# Altium PCB LM2596.PcbDoc
Units mm, origin at the board's own origin, x right, y up, seen from the top; angles counter-clockwise.
Board outline 46.5 x 27.5 mm, 2 copper layers (Top Layer, Bottom Layer), stack 1.571 mm thick; 7 components, 5 nets, 22 pads, 35 vias.
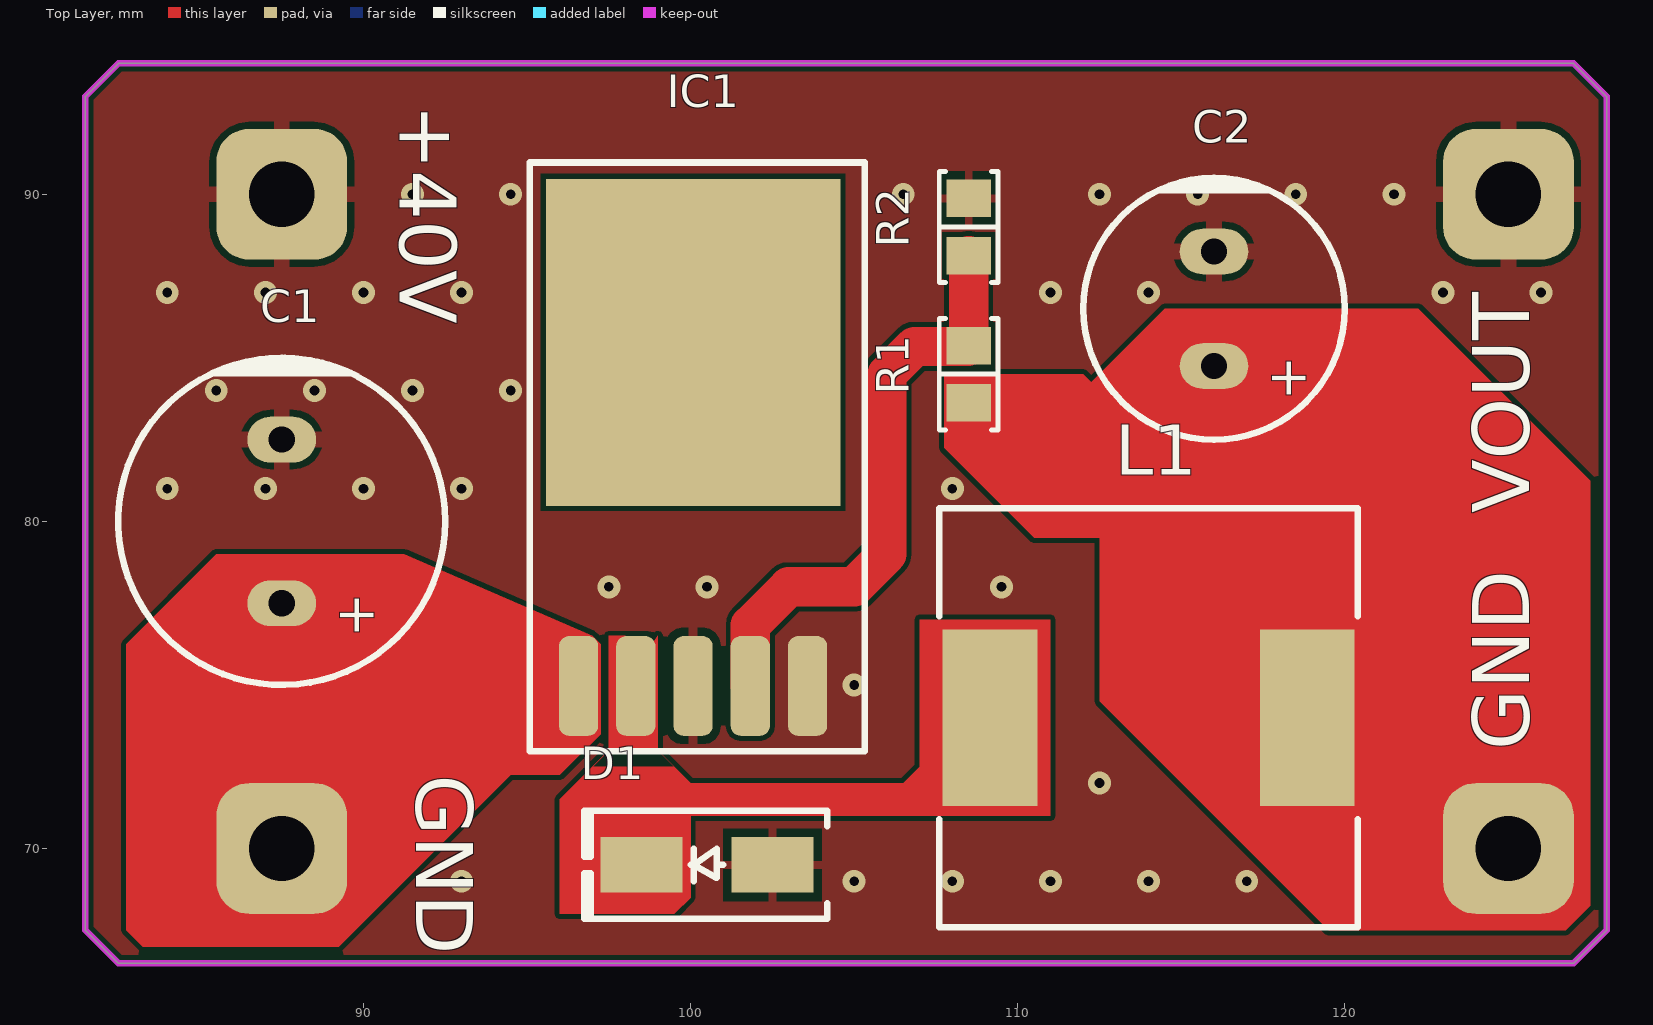
[diagram p0: Top Layer view]
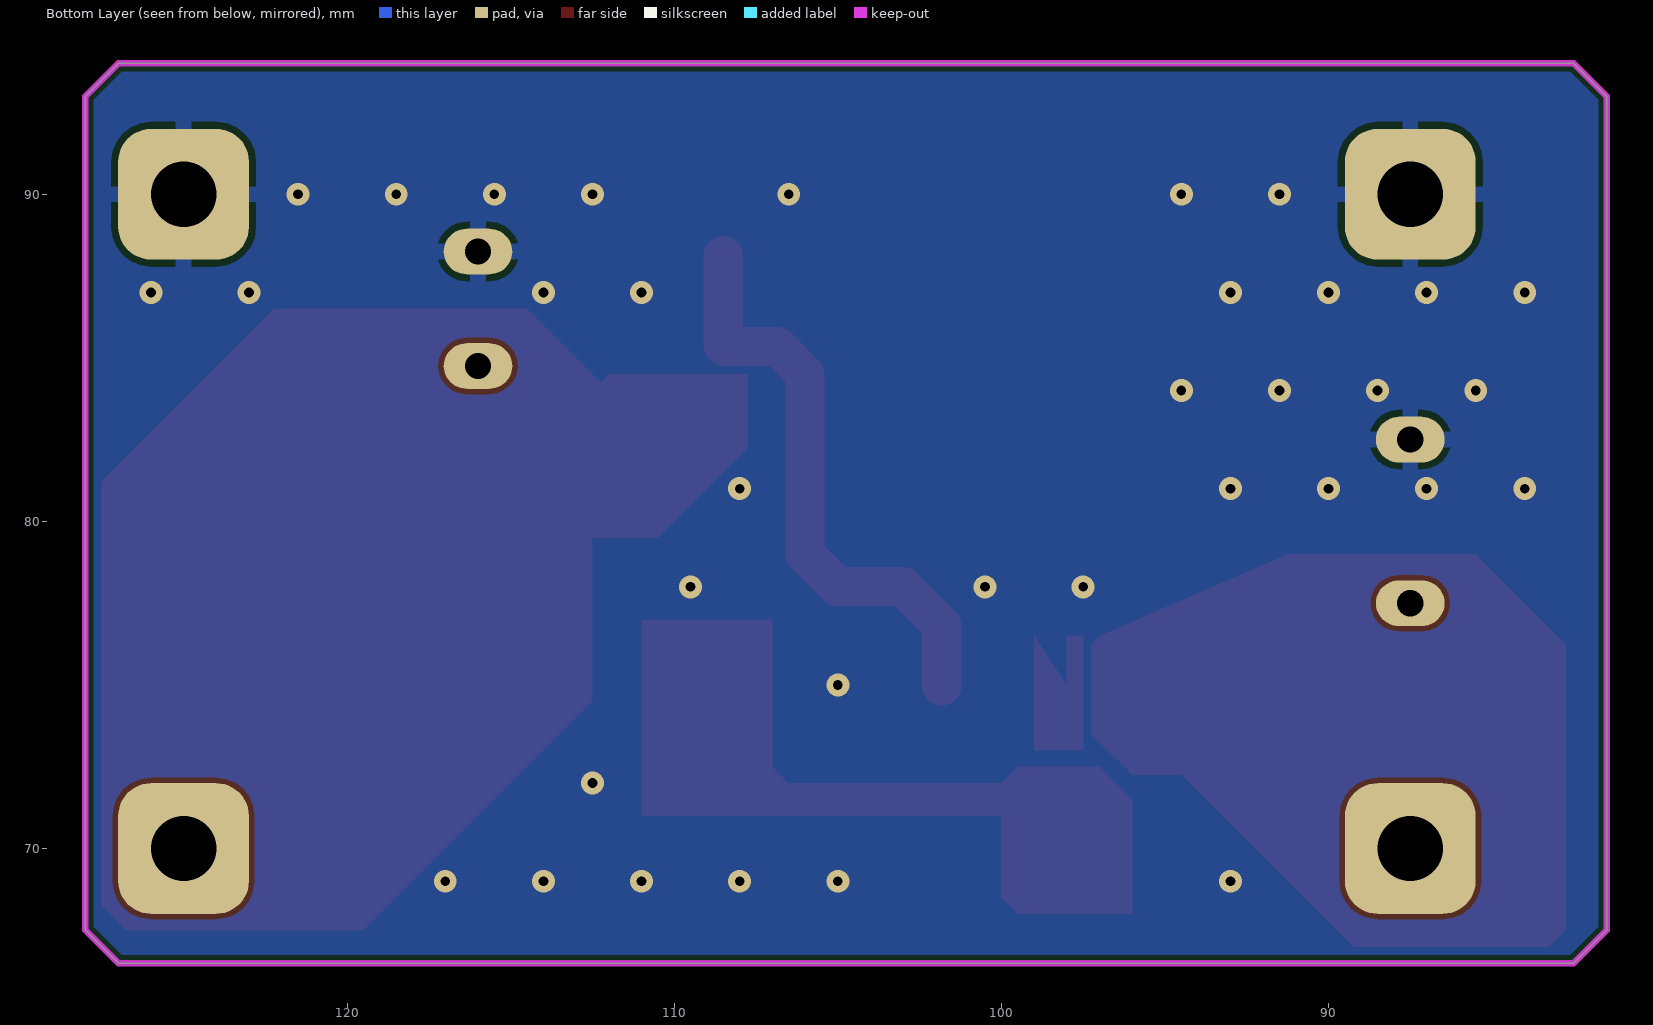
[diagram p1: Bottom Layer view, seen from below]
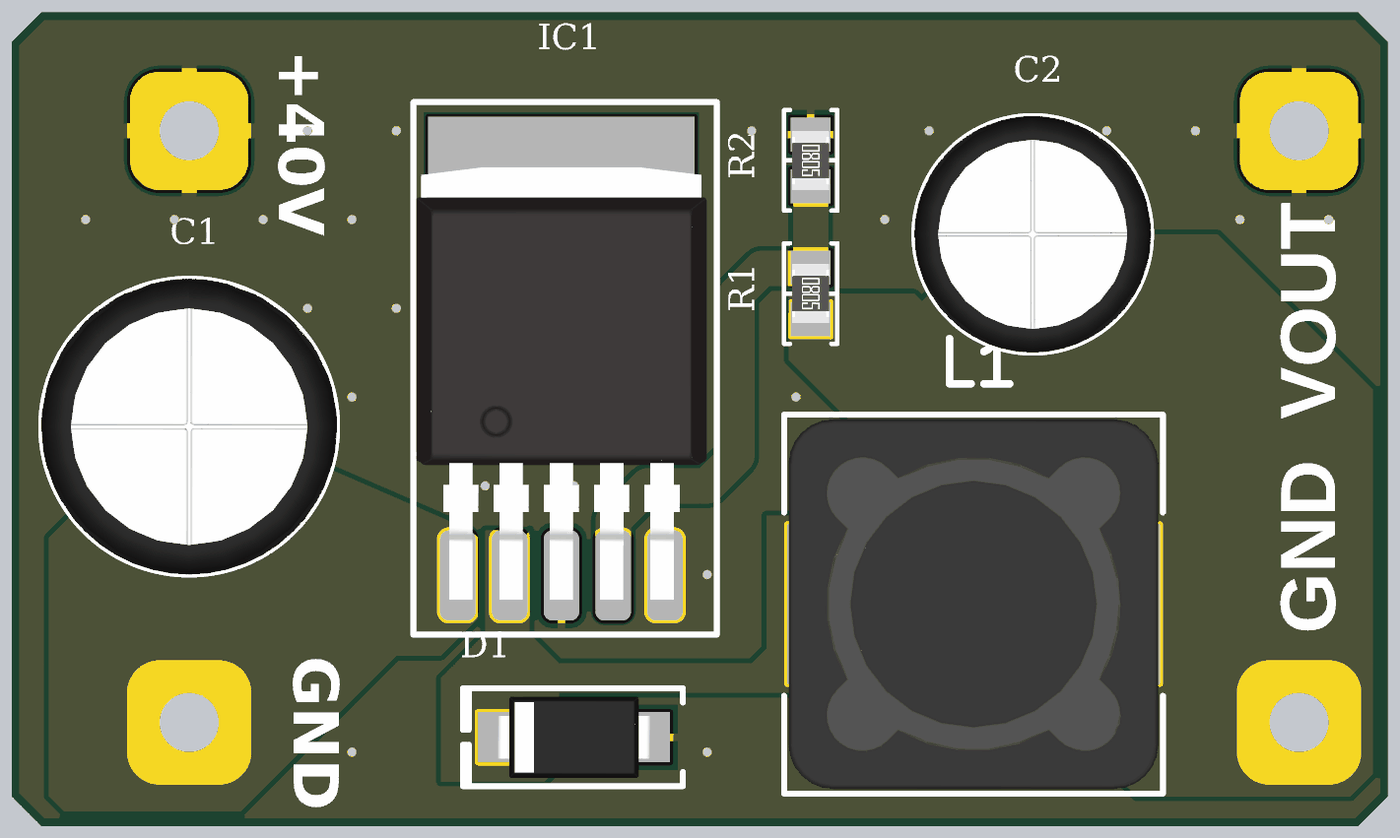
[diagram p2: 3D render of the assembled board from above, using the file's embedded part models]

## Layer stack, top to bottom
Top Solder: solder mask 0.0102, Solder Resist, Dk 3.5
Top Layer: signal copper 0.0356
Dielectric 1: dielectric 1.5, FR-4, Dk 4.8
Bottom Layer: signal copper 0.0356
Bottom Solder: solder mask 0.0102, Solder Resist, Dk 3.5

## Board outline
81.5,67.5 81.5,93 82.5,94 127,94 128,93 128,67.5 127,66.5 82.5,66.5

## Design rules (kind name [scope] priority, off if disabled: settings)
Clearance [All] p1: gap=0.152 ignorepadtopadclearanceinfootprint=FALSE
HoleSize [All] p1: absolutevalues=TRUE maxlimit=5 minlimit=0.025 maxpercent=80.000 minpercent=20.000
PolygonConnect [All] p1: thpad.connectstyle=Relief thpad.reliefconductorwidth=0.5 thpad.reliefentries=4 thpad.polygonreliefangle="90 Angle" thpad.airgapwidth=0.2 smdpad.connectstyle=Relief smdpad.reliefconductorwidth=0.254 smdpad.reliefentries=4 smdpad.polygonreliefangle="90 Angle" smdpad.airgapwidth=0.254 via.connectstyle=Direct via.reliefconductorwidth=0.254 via.reliefentries=4 via.polygonreliefangle="90 Angle" via.airgapwidth=0.254
RoutingVias [All] p1: holewidth=0.711 width=1.27 viastyle="Through Hole" minholewidth=0.711 minwidth=1.27 maxholewidth=0.711 maxwidth=1.27
SolderMaskExpansion [All] p1: expansion=0.102 istentingtop=FALSE
Width [All] p1: maxlimit=2 minlimit=0.152 preferedwidth=0.5
29 further rules are at their usual default settings.

## Components (designator, comment, footprint, x,y, rotation, side; value= is the part's Value field where it differs from the comment)
C1 "100µF" "CAP TH ALUM ELEC D10.00mm S5.00mm H13.50mm" 87.5,80 r270 top
C2 "220µF" "CAP TH ALUM ELEC D8.00mm S3.50mm H12.50mm" 116,86.5 r270 top
D1 "ACDBA560-HF" "DO214AC SMA" 100.5,69.5 r180 top
IC1 "LM2596" D2PAK 100.076,82.971 r0 top
L1 "33µH" "BOURNS SRR1280" 114,74 r0 top
R1 "10 kOhms" "RES 0805_2012" 108.5,84.5 r270 top
R2 "4.7 kOhms" "RES 0805_2012" 108.5,89 r270 top

## Footprints (in the part's own frame and the unit in brackets; to place one, negate y for a bottom-side part, rotate by r counter-clockwise, add the part's x,y. Pads: shape width x height; smd on the part's side, far side on the other; paste and mask are expansions set on the pad)
"BOURNS SRR1280" [mm] "Precision Wire Wound Inductor, 2-Leads, Body 12.50x12.50mm, IPC Medium Density"
  rect 2.9x5.4 smd: 1(-4.85,0) 2(4.85,0)
  silkscreen extent -6.4,-6.4 6.4,6.4, body extent -6.25,-6.25 6.25,6.25, height 7.9
"CAP TH ALUM ELEC D8.00mm S3.50mm H12.50mm" [mm] "8mm Diameter 3.5mm Lead Spacing Aluminum Electrolytic Capacitors Radial, Can"
  oval 1.4x2.1 hole 0.8: 1(1.75,0) 2(-1.75,0)
  silkscreen extent -4,-4 4,4, body extent -4.01,-4 4,4, height 12.5
"CAP TH ALUM ELEC D10.00mm S5.00mm H13.50mm" [mm] "10mm Diameter 5mm Lead Spacing Aluminum Electrolytic Capacitors Radial, Can"
  oval 1.4x2.1 hole 0.8: 1(2.5,0) 2(-2.5,0)
  silkscreen extent -5,-5 5,5, body extent -5.01,-5 5,5, height 13.5
D2PAK [mm]
  rrect50% 1.2x3.05 smd: 1(-3.5,-8) 2(-1.75,-8) 3(0,-8) 4(1.75,-8) 5(3.5,-8)
  rect 9x10 smd: 6(0,2.5)
  silkscreen extent -5,-10 5.25,8, body extent -4.91,-8.81 4.91,5.79, height 4.22
"DO214AC SMA" [mm] "Molded Diode, 2-Leads, Body 4.30x2.60mm, IPC Medium Density"
  rect 2.5x1.7 smd: 1(-2,0) 2(2,0)
  silkscreen extent -3.68,-1.65 3.75,1.65, body extent -2.6,-1.37 2.6,1.37, height 2.4
"RES 0805_2012" [mm] "Chip Resistor, 2-Leads, Body 2.00x1.25mm, IPC Medium Density"
  rect 1.15x1.35 smd: 1(-0.875,0) 2(0.875,0)
  silkscreen extent -1.7,-0.9 1.7,0.9, body extent -1,-0.62 1,0.63, height 0.6

## Part data
C1: library part ECA-1JHG101, "CAP ALUM 100UF 20% 63V RADIAL", Device Package="Radial, Can", Lifetime @ Temp.="2000 Hrs @ 105°C", Manufacturer="Panasonic Electronic Components", Operating Temperature="-55°C ~ 105°C", Ripple Current @ High Frequency="322.5mA @ 100kHz", Ripple Current @ Low Frequency="215mA @ 120Hz", Supplier Part Number 1=P5582-ND, Tolerance=±20%, Voltage - Rated=63V, Applications="General Purpose", Capacitance=100µF, ComponentLink1Description=Datasheet, ComponentLink1URL=http://industrial.panasonic.com/www-cgi/jvcr13pz.cgi?E+PZ+3+ABA0026+ECA1JHG101+7+WW, ComponentLink2Description="DigiKey Link", ComponentLink2URL=http://digikey.com/product-detail/en/panasonic-electronic-components/ECA-1JHG101/P5582-ND/245181, Height - Seated (Max)="0.532\" (13.50mm)", LastUpdated="9/2/2020 1:31:06 AM", Lead Spacing="0.197\" (5.00mm)", Lifecycle Status=Active, Minimum Order=1, Mounting Type="Through Hole", Package / Case="Radial, Can", Packaging=Bulk, Part Number=ECA-1JHG101, Part Status=Active, PartId=10746, Polarization=Polar, Price=0.54, Series=NHG, Size / Dimension="0.394\" Dia (10.00mm)", Supplier 1=DigiKey
C2: library part ECA-1VM221, "CAP ALUM 220UF 20% 35V RADIAL", Device Package="Radial, Can", Lifetime @ Temp.="2000 Hrs @ 85°C", Manufacturer="Panasonic Electronic Components", Operating Temperature="-40°C ~ 85°C", Ripple Current @ High Frequency="595mA @ 10kHz", Ripple Current @ Low Frequency="350mA @ 120Hz", Supplier Part Number 1=P5166-ND, Tolerance=±20%, Voltage - Rated=35V, Applications="General Purpose", Capacitance=220µF, ComponentLink1Description=Datasheet, ComponentLink1URL=//media.digikey.com/pdf/Data%20Sheets/Panasonic%20Electronic%20Components/ECA-xxM%20Series,TypeA.pdf, ComponentLink2Description="DigiKey Link", ComponentLink2URL=http://digikey.com/product-detail/en/panasonic-electronic-components/ECA-1VM221/P5166-ND/245025, Height - Seated (Max)="0.492\" (12.50mm)", LastUpdated="9/7/2020 5:24:51 AM", Lead Spacing="0.138\" (3.50mm)", Lifecycle Status=Active, Minimum Order=1, Mounting Type="Through Hole", Package / Case="Radial, Can", Packaging=Bulk, Part Number=ECA-1VM221, Part Status=Active, PartId=7280, Polarization=Polar, Price=0.31, Series=M, Size / Dimension="0.315\" Dia (8.00mm)", Supplier 1=DigiKey
D1: "DIODE SCHOTTKY 60V 5A DO214AC", Capacitance @ Vr, F="250pF @ 4V, 1MHz", Current - Average Rectified (Io)="5A (DC)", Current - Reverse Leakage @ Vr="500µA @ 60V", Manufacturer="Comchip Technology", Operating Temperature - Junction="-55°C ~ 125°C", Package / Case="DO-214AC, SMA", Supplier Device Package="DO-214AC (SMA)", Supplier Part Number 1=641-2078-1-ND, Voltage - DC Reverse (Vr) (Max)=60V, ComponentLink1Description=Datasheet, ComponentLink1URL=http://www.comchiptech.com/admin/files/product/ACDBA560-HF%20RevA201382.pdf, ComponentLink2Description="DigiKey Link", ComponentLink2URL=http://digikey.com/product-detail/en/comchip-technology/ACDBA560-HF/641-2078-1-ND/10131664, Diode Type=Schottky, LastUpdated="9/2/2020 1:19:04 AM", Lifecycle Status=Active, Minimum Order=1, Mounting Type="Surface Mount", Packaging=TapeAndReel, Part Number=ACDBA560-HF, Part Status=Active, PartId=1832, Price=0.13, Series="Automotive, AEC-Q101", Speed="Fast Recovery =< 500ns, > 200mA (Io)", Supplier 1=DigiKey, Voltage - Forward (Vf) (Max) @ If=60V
L1: library part SRR1280-330M, "FIXED IND 33UH 3.5A 57 MOHM SMD", Current - Saturation=3.3A, Current Rating (Amps)=3.5A, DC Resistance (DCR)="57mOhm Max", Device Package=Nonstandard, Frequency - Self Resonant=9.5MHz, Inductance Frequency - Test=100kHz, Manufacturer="Bourns Inc.", Operating Temperature="-40°C ~ 125°C", Q @ Freq="28 @ 2.52MHz", Supplier Part Number 1=SRR1280-330MCT-ND, Tolerance=±20%, ComponentLink1Description=Datasheet, ComponentLink1URL=https://www.bourns.com/docs/Product-Datasheets/SRR1280.pdf, ComponentLink2Description="DigiKey Link", ComponentLink2URL=http://digikey.com/product-detail/en/bourns-inc/SRR1280-330M/SRR1280-330MCT-ND/2127440, Height - Seated (Max)="0.315\" (8.00mm)", Inductance=33µH, LastUpdated="9/2/2020 1:22:09 AM", Lifecycle Status=Active, Material - Core=Ferrite, Minimum Order=1, Mounting Type="Surface Mount", Package / Case=Nonstandard, Packaging=TapeAndReel, Part Number=SRR1280-330M, Part Status=Active, PartId=25, Price=0.65, Series=SRR1280, Shielding=Shielded, Size / Dimension="0.492\" L x 0.492\" W (12.50mm x 12.50mm)", Supplier 1=DigiKey, Type=Wirewound
R1: library part RNCP0805FTD10K0, "RES 10K OHM 1% 1/4W 0805", Device Package="0805 (2012 Metric)", Manufacturer="Stackpole Electronics Inc", Operating Temperature="-55°C ~ 155°C", Power (Watts)="0.25W, 1/4W", Supplier Device Package=0805, Supplier Part Number 1=RNCP0805FTD10K0CT-ND, Temperature Coefficient=±100ppm/°C, Tolerance=±1%, ComponentLink1Description=Datasheet, ComponentLink1URL=https://www.seielect.com/catalog/sei-rncp.pdf, ComponentLink2Description="DigiKey Link", ComponentLink2URL=http://digikey.com/product-detail/en/stackpole-electronics-inc/RNCP0805FTD10K0/RNCP0805FTD10K0CT-ND/2240601, Composition="Thin Film", Features="Anti-Sulfur, Moisture Resistant", Height - Seated (Max)="0.024\" (0.60mm)", LastUpdated="9/2/2020 1:15:23 AM", Lifecycle Status=Active, Minimum Order=1, Number of Terminations=2, Package / Case="0805 (2012 Metric)", Packaging=TapeAndReel, Part Number=RNCP0805FTD10K0, Part Status=Active, PartId=28021, Price=0.01, Resistance="10 kOhms", Series=RNCP, Size / Dimension="0.079\" L x 0.049\" W (2.00mm x 1.25mm)", Supplier 1=DigiKey
R2: library part RC0805FR-074K7P, "RES SMD 4.7K OHM 1% 1/8W 0805", Device Package="0805 (2012 Metric)", Manufacturer=Yageo, Operating Temperature="-55°C ~ 155°C", Power (Watts)="0.125W, 1/8W", Supplier Device Package=0805, Supplier Part Number 1=YAG1325CT-ND, Temperature Coefficient=±100ppm/°C, Tolerance=±1%, ComponentLink1Description=Datasheet, ComponentLink1URL=http://www.yageo.com/NewPortal/yageodocoutput?fileName=/pdf/R-Chip/PYu-RC_51_RoHS_P_0.pdf, ComponentLink2Description="DigiKey Link", ComponentLink2URL=http://digikey.com/product-detail/en/yageo/RC0805FR-074K7P/YAG1325CT-ND/4935438, Composition="Thick Film", Features="Moisture Resistant", Height - Seated (Max)="0.024\" (0.60mm)", LastUpdated="9/2/2020 1:15:24 AM", Lifecycle Status=Active, Minimum Order=1, Number of Terminations=2, Package / Case="0805 (2012 Metric)", Packaging=TapeAndReel, Part Number=RC0805FR-074K7P, Part Status=Active, PartId=27895, Price=0.01, Resistance="4.7 kOhms", Series="RC-P Lead Free", Size / Dimension="0.079\" L x 0.049\" W (2.00mm x 1.25mm)", Supplier 1=DigiKey

## Free pads (board coordinates)
  rrect50% 4x4 hole 2: GND(87.5,90) GND(125,90) VIN(87.5,70) VOUT(125,70)

## Via types
v1: diameter 0.7, hole 0.3, Top Layer to Bottom Layer, tented both sides, 35 vias

## Nets (pads, with @x,y where several pads share a name; then routed paths per layer and width w, separated by ;. In a path a pad name is that pad's centre, name@x,y a point inside that pad or via, vN(x,y) a via of type N, cw(c..) or ccw(c..) an arc to the next point about the centre after c; other vN are vias at no path point)
+12: C2.1 L1.2 pad.VOUT R1.2
GND: C1.2 C2.2 D1.1 IC1.3 IC1.5 pad.GND R2.1
  other v1: 93,69 105,69 108,69 111,69 114,69 117,69 112.5,72 105,75 97.5,78 100.5,78 109.5,78 84,81 87,81 90,81 93,81 108,81 85.5,84 88.5,84 91.5,84 94.5,84 84,87 87,87 90,87 93,87 111,87 114,87 123,87 126,87 91.5,90 94.5,90 106.5,90 112.5,90 115.5,90 118.5,90 121.5,90
NetD1_2: D1.2 IC1.2 L1.1
NetIC1_4: IC1.4 R1.1 R2.2 | length 18
  Top Layer w1.2: IC1.4 101.826,76.826 103,78 105,78 106,79 106,84.5 106.85,85.35 108.475,85.35 R1.1 R2.2
VCC: C1.1 IC1.1 pad.VIN
pads on no net: IC1.6

## Polygon pours and split planes (outlines as drawn)
GND on Bottom Layer "NONET_L01_P-001" (solid, pour order 0): 82.5,94 81.5,93 81.5,67.5 82.5,66.5 127,66.5 128,67.5 128,93 127,94
GND on Top Layer "NONET_L01_P-001" (solid, pour order 1): 82.5,94 81.5,93 81.5,67.5 82.5,66.5 127,66.5 128,67.5 128,93 127,94

## Keep-outs
Keep-Out Layer:
  the board outline again, w0.2

## Other copper
Top Layer:
  region net +12: 112,84.5 112.25,84.25 114.5,86.5 122.25,86.5 127.5,81.25 127.5,68.25 126.75,67.5 119.5,67.5 112.5,74.5 112.5,79.5 110.5,79.5 107.75,82.25 107.75,84.5 108.5,84.5
  region net VCC: 97,76.5 97.25,76.25 97.25,73.5 96,72.25 94.5,72.25 89.25,67 83.25,67 82.75,67.5 82.75,76.25 85.5,79 91.25,79
  region net NetD1_2: 99,76.5 99,73 100,72 106.5,72 107,72.5 107,77 111,77 111,71 103.5,71 103,71 102.5,71 100,71 100,68.5 99.5,68 96,68 96,71.5 98,73.5 98,76.5 97.5,76.5 97.5,73 99,73 99.5,72.5 97,72.5 98,73.5 98,75

## Silkscreen, mask and mechanical layers (free items; w line width, h text height)
Top Overlay:
  text "+40V" at 90.526,92.75 h3 r270
  text "VOUT" at 126.215,80.25 h3 r90
  text "GND" at 126.215,73 h3 r90
  text "GND" at 91.026,72.25 h3 r270

## Text inside footprints (layer, text, board x,y; h text height)
C1: Top Overlay "+" at 88.9,77.8 h2 r270
C2: Top Overlay "+" at 117.4,85.05 h2 r270